# Allegro board alimentation.brd
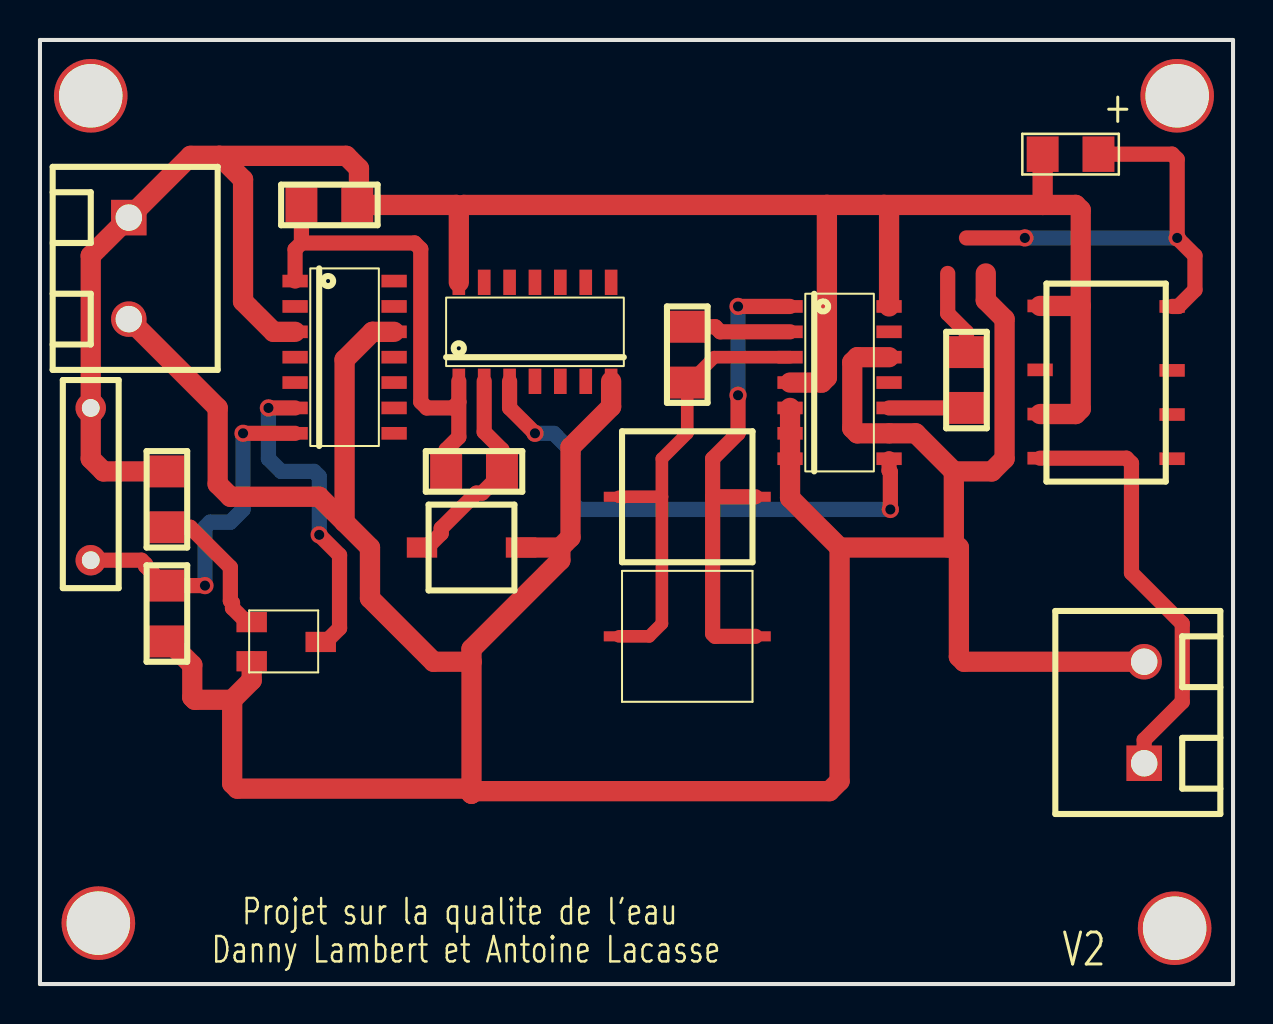
[diagram p0: board, top side]
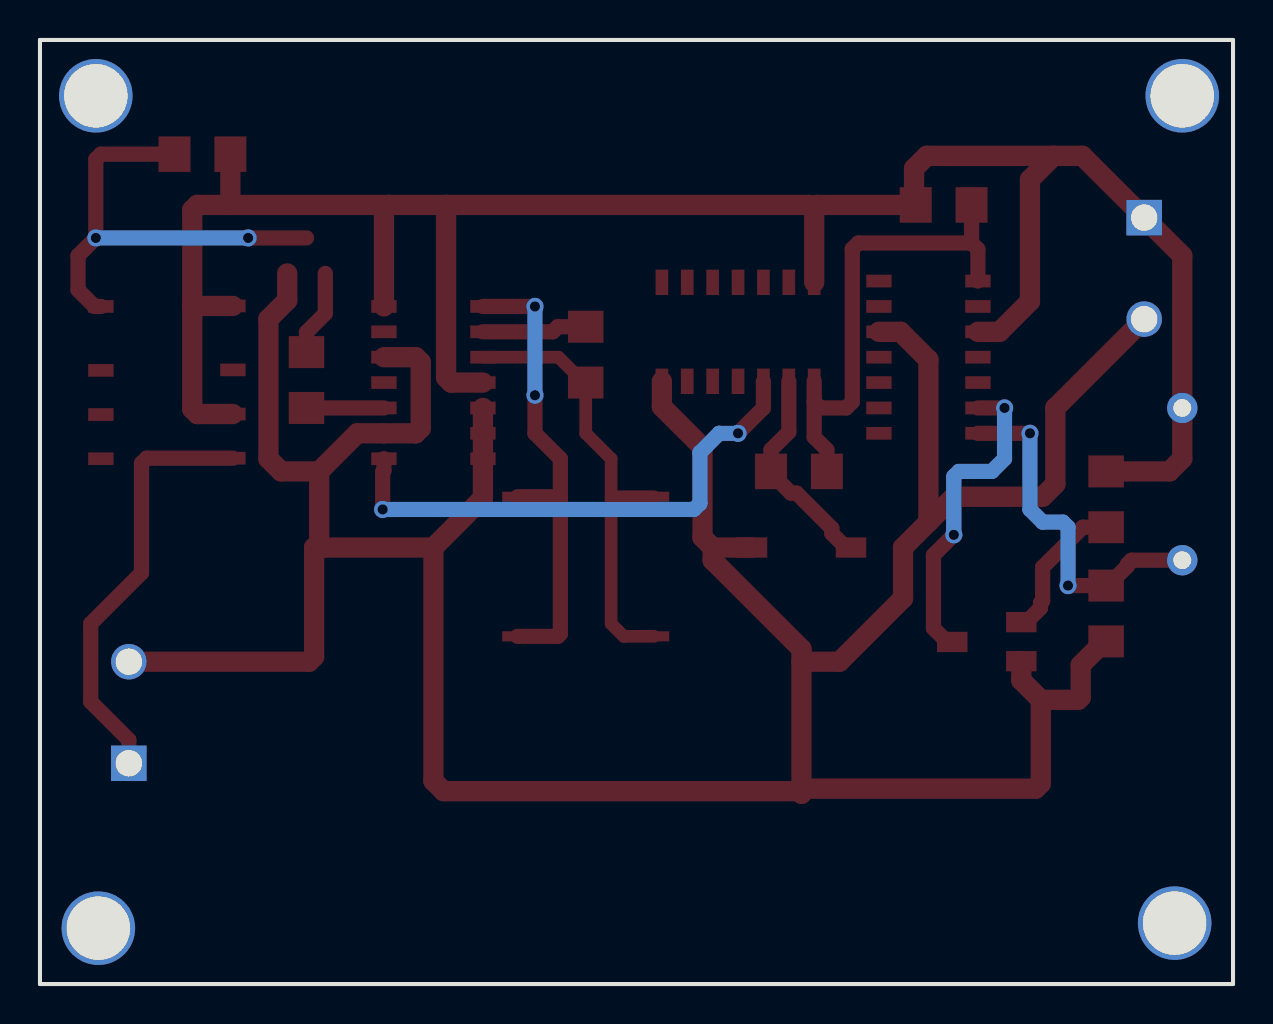
[diagram p1: board, bottom side, seen from below]

Outline 59.69 x 47.24 mm; copper layers: TOP, BOTTOM. Coordinates in mm from the lower left corner of the outline.

## Design rules (mm)
nets with their own width: min track width 0.635; nets N00765 N00904 N00918 N01056 N01087 N01308 N01887 N02030 N02295 N02678 N03203 N09763
nets with their own width: min track width 1.016; nets GND VCC

## Placement (name value [footprint] x y rotation side)
C1  10u  [C10]  21.59 21.84 0 top
C2  47u  [C220]  32.39 24.38 0 top
C3  47u  [C220]  32.39 17.4 0 top
D1  DIODE  [R_1206]  50.16 41.53 0 top
JP1  Alim.pan.  [CONNECTEUR_2_200]  4.45 38.35 270 top
JP2  AlimArduino  [CONNECTEUR_2_200]  55.25 11.05 90 top
LS1  G6A-DPDT  [RELAIS]  53.34 30.1 0 top
NOREF  -  [unnamed]  0 0 0 top
Q1  2N4401  [SOT23-312]  46.36 36.45 90 top
R1  100k  [R_1206]  6.35 19.94 270 top
R2  200k  [R_1206]  20.32 25.65 0 top
R3  100k  [R_1206]  6.35 25.65 270 top
R4  POT=100k  [POT]  12.19 17.14 0 top
R5  photo-cell  [PHORES]  2.54 25.02 180 top
R6  500k  [R_1206]  32.39 30.1 90 top
R7  5.1k  [R_1206]  46.36 28.83 90 top
R8  10k  [R_1206]  15.88 38.99 180 top
U1  LM339  [SOIC14]  15.24 31.37 0 top
U2  74HCT86  [SOIC14]  24.76 32.64 90 top
U3  CD4047  [SOIC14]  40.01 30.1 0 top

## Library data of the parts
C1-C3 = C
D1 = DIODE
JP1 JP2 = HEADER 2_0
LS1 = G6A-DPDT_1
Q1 = NPN BCE_0
R1-R3 R6-R8 = R
R4 = POT_0
R5 = RESISTOR VAR 2
U1 = LM339: Tolerance: ***; User Part Number: ***
U2 = 74HCT86_0: Tolerance: ***; User Part Number: ***
U3 = 4047_5: Tolerance: ***; User Part Number: ***

## Footprints (pads in the part's own frame, mm; a bottom-side part is the same pattern mirrored in y, then rotated)
C10
  rect 1.524x1.016 smd: 1(-2.477,0) 2(2.477,0)
C220
  rect 1.524x0.508 smd: 1(-3.416,0) 2(3.416,0)
CONNECTEUR_2_200
  rect 1.778x1.778 hole 1.321: 1(0,0)
  round 1.778 hole 1.321: 2(5.08,0)
PHORES
  round 1.524 hole 0.889: 1(0,3.81) 2(0,-3.81)
POT
  rect 1.524x1.016 smd: 1(-1.6,0.965) 2(-1.6,-0.991) 3(1.854,-0.025)
R_1206
  rect 1.6x1.778 smd: 1(0,0) 2(2.794,0)
RELAIS
  rect 1.27x0.635 smd: 1(-3.302,3.835) 2(-3.302,0.635) 3(-3.302,-1.575) 4(-3.302,-3.785) 5(3.302,-3.81) 6(3.302,-1.6) 7(3.302,0.61) 8(3.302,3.81)
SOIC14
  rect 1.27x0.635 smd: 1(-2.477,3.81) 2(-2.477,2.54) 3(-2.477,1.27) 4(-2.477,0) 5(-2.477,-1.27) 6(-2.477,-2.54) 7(-2.477,-3.81) 8(2.477,-3.81) 9(2.477,-2.54) 10(2.477,-1.27) 11(2.477,0) 12(2.477,1.27) 13(2.477,2.54) 14(2.477,3.81)
SOT23-312
  rect 0.508x0.432 smd: 1(-0.889,0.94) 2(-0.889,-0.965) 3(0.889,0)
unnamed
  round 3.683 hole 3.175 unplated: (2.54,44.45) (2.921,3.048) (56.769,2.794) (56.896,44.45)

## Nets
GND: C1.2 JP1.2 JP2.2 Q1.2(EMITTER) R1.2 R4.2(B) U1.12(V-) U2.7(GND) U3.5(AST) U3.6(-T) U3.7(VSS) U3.9(RST) U3.12(RET)
VCC: D1.1(K) JP1.1 LS1.1(COIL2) LS1.3(COMMON1) R3.1 R5.2 R8.1 U1.3(V+) U2.14(VCC) U3.4(AST/) U3.14(VDD)
N00765: R1.1 R5.1 U1.7(+IN)
N00904: R2.1 R8.2 U1.1(OUT) U2.1(I0)
N00918: C1.1 R2.2 U2.2(I1)
N01056: R3.2 R4.1(A)
N01087: U2.3(O) U3.8(+T)
N01308: C2.1 C3.1 R6.1 U3.3(RCC)
N01887: D1.2(A) LS1.8(COIL1) Q1.3(COLLECTOR)
N02030: Q1.1(BASE) R7.2
N02295: JP2.1 LS1.4(NO1)
N02678: R7.1 U3.10(Q)
N03203: R6.2 U3.2(RX)
N09763: R4.3(WIPER) U1.6(-IN)
N15957: C2.2 C3.2 U3.1(CX)

Pads without a net: LS1 2 5 6 7; U1 2 4 5 8 9 10 11 13 14; U2 4 5 6 8 9 10 11 12 13; U3 11 13

## Via types
v1: diameter 0.864, hole 0.508, TOP to BOTTOM, 10 vias

## Routing (per net, layer and track width the routed paths; a pad name or vN(x,y) marks a point on that pad's centre or on a via; arc(x,y) is an arc through that point)
GND: length 175.4
  TOP w1.016: 15.24,23.11 15.24,31.24 16.63,32.64 U1.12 ; 15.24,23.11 16.51,21.84 16.51,19.3 19.68,16.13 21.59,16.13 ; 15.24,23.11 13.97,24.38 9.53,24.38 8.89,25.02 8.89,28.83 4.45,33.27 ; JP2.2 46.23,16.13 45.97,16.38 45.97,21.84 45.72,22.1 ; 21.59,9.53 21.72,9.65 39.5,9.65 40.01,10.16 40.01,21.84 ; 21.59,9.53 21.59,16.13 ; 21.59,9.53 21.34,9.78 9.87,9.78 9.62,10.03 9.62,14.22 ; U3.12 40.89,31.37 40.64,31.11 40.64,27.81 40.89,27.56 U3.9 43.82,27.56 45.72,25.65 ; 40.01,21.84 45.47,21.84 45.72,22.1 ; 40.01,21.84 37.53,24.32 U3.7 U3.6 U3.5 ; 45.72,22.1 45.72,25.65 ; 45.72,25.65 47.62,25.65 48.26,26.29 48.26,33.27 47.32,34.21 Q1.2 ; 9.62,14.22 10.59,15.2 R4.2 ; 9.62,14.22 7.75,14.22 7.62,14.35 7.62,15.96 6.44,17.14 R1.2 ; 26.04,21.84 26.04,21.21 21.59,16.76 21.59,16.13 ; 26.04,21.84 C1.2 ; 26.04,21.84 26.54,22.35 26.54,26.86 28.57,28.89 U2.7
VCC: length 115.5
  TOP w1.016: U3.14 42.48,38.73 42.23,38.99 ; 20.95,38.73 20.95,38.86 20.83,38.99 R8.1 15.96,39.07 15.96,40.81 15.32,41.45 8.97,41.45 ; 20.95,38.73 21.21,38.99 39.37,38.99 ; 20.95,38.73 U2.14 ; U3.4 39.12,30.1 39.37,30.35 39.37,38.99 ; 39.37,38.99 42.23,38.99 ; 42.23,38.99 50.16,38.99 ; 52.07,33.93 52.07,38.73 51.82,38.99 50.16,38.99 ; 52.07,33.93 LS1.1 ; 52.07,33.93 52.07,28.78 51.82,28.52 LS1.3 ; U1.3 11.68,32.64 10.16,34.16 10.16,40.26 8.97,41.45 ; 50.16,38.99 D1.1 ; 8.97,41.45 7.54,41.45 JP1.1 2.54,36.45 R5.2 2.54,26.29 3.17,25.65 R3.1
N00765: length 17.9
  TOP w0.762: 2.54,21.21 5.08,21.21 5.28,21.01 5.28,20.92 6.26,19.94 R1.1 v1(8.26,19.94) ; U1.7 v1(10.16,27.56)
  BOTTOM w0.762: v1(10.16,27.56) 10.16,23.75 9.53,23.11 8.51,23.11 8.26,22.86 v1(8.26,19.94)
N00904: length 24.6
  TOP w0.762: R2.1 20.32,26.74 20.95,27.37 20.95,29.13 ; U1.1 12.76,36.77 13.08,37.08 ; U2.1 20.95,29.13 ; 20.95,29.13 20.65,28.83 19.35,28.83 19.05,29.13 19.05,36.78 18.75,37.08 13.08,37.08 ; 13.08,37.08 R8.2
N00918: length 10.7
  TOP w0.762: U2.2 22.22,27.63 23.11,26.74 R2.2 23.11,25.57 22.12,24.57 21.84,24.57 20.07,22.8 20.07,22.55 19.37,21.84 C1.1
N01056: length 7.3
  TOP w0.762: R4.1 10.34,18.11 9.63,18.82 9.63,19.07 9.53,19.18 9.53,20.85 7.52,22.86 R3.2
N01087: length 26.5
  TOP w0.762: v1(42.55,23.75) 42.55,25.63 42.48,25.69 U3.8 ; v1(24.76,27.56) 23.49,28.83 U2.3
  BOTTOM w0.762: v1(42.55,23.75) 26.97,23.75 26.67,24.05 26.67,26.59 25.7,27.56 v1(24.76,27.56)
N01308: length 22.8
  TOP w0.635: 31.11,24.38 31.11,26.29 32.39,27.56 R6.1 32.47,30.1 33.74,31.37 U3.3 ; 31.11,24.38 31.11,18.03 30.48,17.4 C3.1 ; 31.11,24.38 C2.1
N01887: length 23
  TOP w0.762: 46.36,37.34 v1(49.28,37.34) ; D1.2 56.64,41.53 56.9,41.27 v1(56.9,37.34) 57.79,36.45 57.79,34.73 56.96,33.91 LS1.8
  BOTTOM w0.762: v1(49.28,37.34) v1(56.9,37.34)
N02030: length 4.3
  TOP w0.762: Q1.1 45.42,33.56 46.36,32.62 R7.2
N02295: length 21.5
  TOP w0.762: JP2.1 55.25,12.22 57.15,14.12 57.15,18.03 54.61,20.57 54.61,26.06 54.36,26.31 LS1.4
N02678: length 3.9
  TOP w0.762: R7.1 U3.10
N03203: length 5.2
  TOP w0.762: U3.2 34.04,32.64 33.78,32.89 R6.2
N09763: length 16
  TOP w0.762: U1.6 v1(11.43,28.83) ; v1(13.97,22.48) 14.99,21.46 14.99,17.81 14.3,17.12 R4.3
  BOTTOM w0.762: v1(13.97,22.48) 13.97,25.4 13.72,25.65 12.06,25.65 11.43,26.29 v1(11.43,28.83)
N15957: length 23.9
  TOP w0.762: 33.66,24.38 C2.2 ; 33.66,24.38 33.66,17.53 33.78,17.4 C3.2 ; 33.66,24.38 33.66,26.29 34.93,27.56 v1(34.93,29.46) ; U3.1 v1(34.93,33.91)
  BOTTOM w0.762: v1(34.93,33.91) v1(34.93,29.46)

## Text on the board
Ref Des/Assembly Top: +
Ref Des/Silkscreen Top: Danny Lambert et Antoine Lacasse | Projet sur la qualite de l'eau | V2 | +
